# Altium PCB Q7 mini.PcbDoc
Units mm, origin at the board's own origin, x right, y up, seen from the top; angles counter-clockwise.
Board outline 24 x 40 mm, 2 copper layers (Top Layer, Bottom Layer); 30 components, 21 nets, 144 pads, 137 vias.
Unrouted connection lines stored in the file: 1.
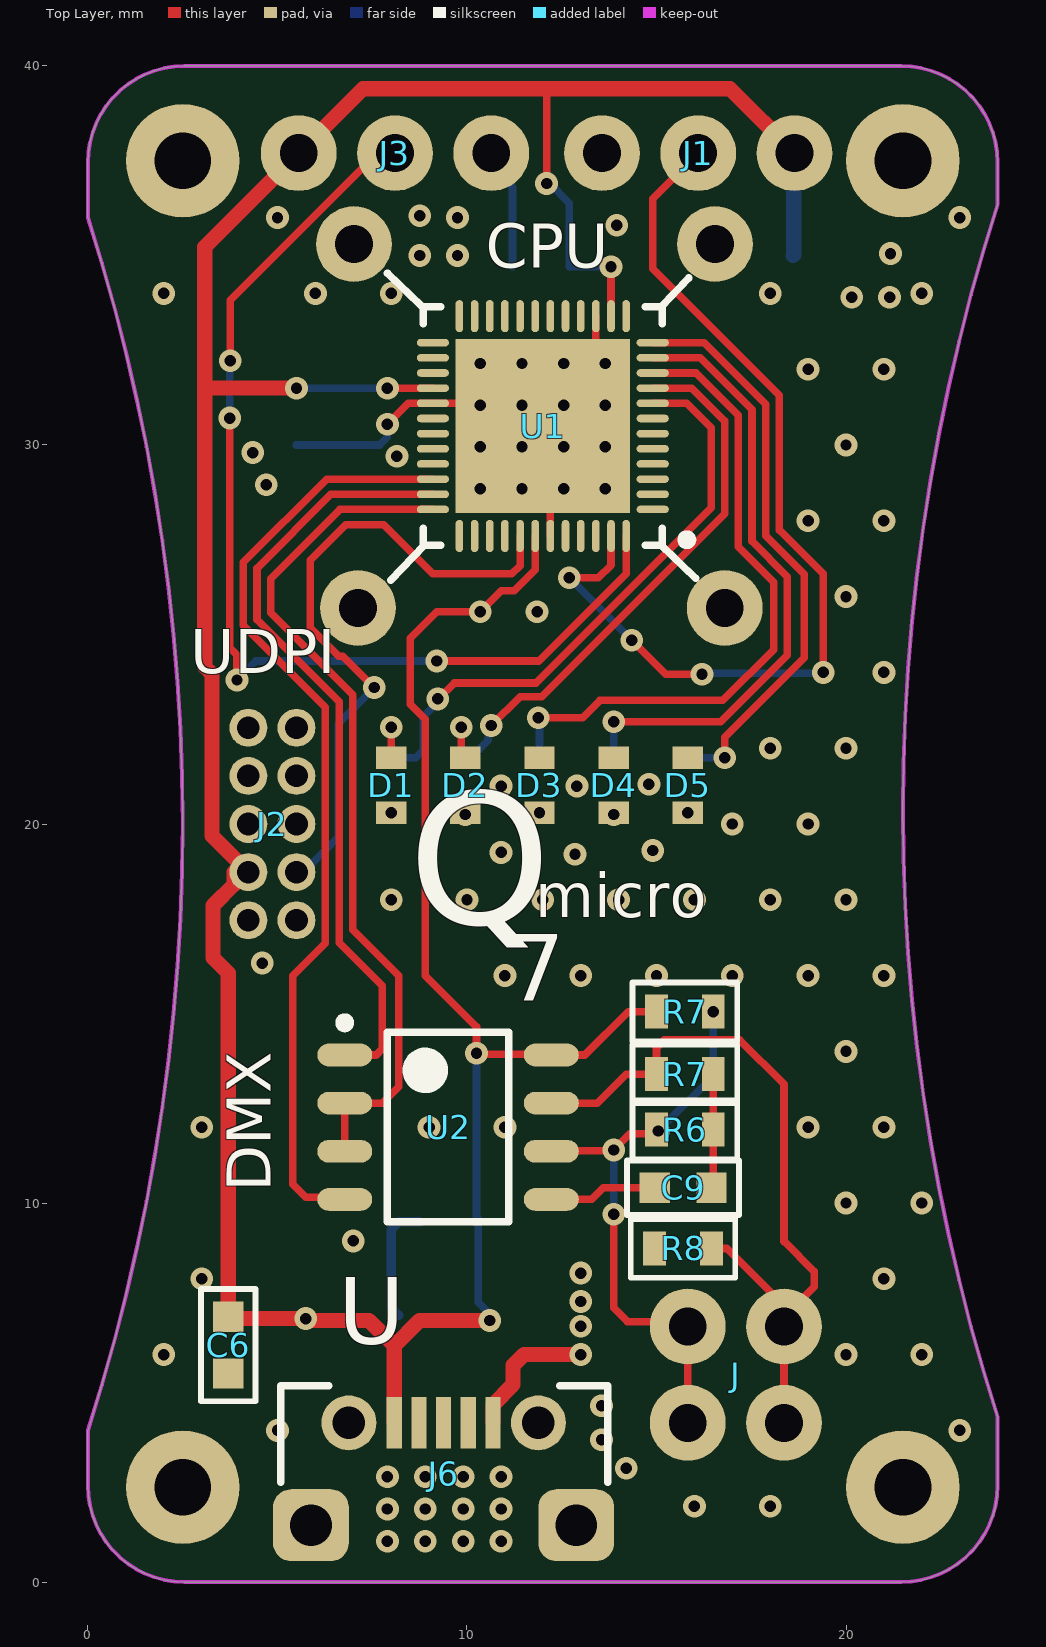
[diagram p0: Top Layer view]
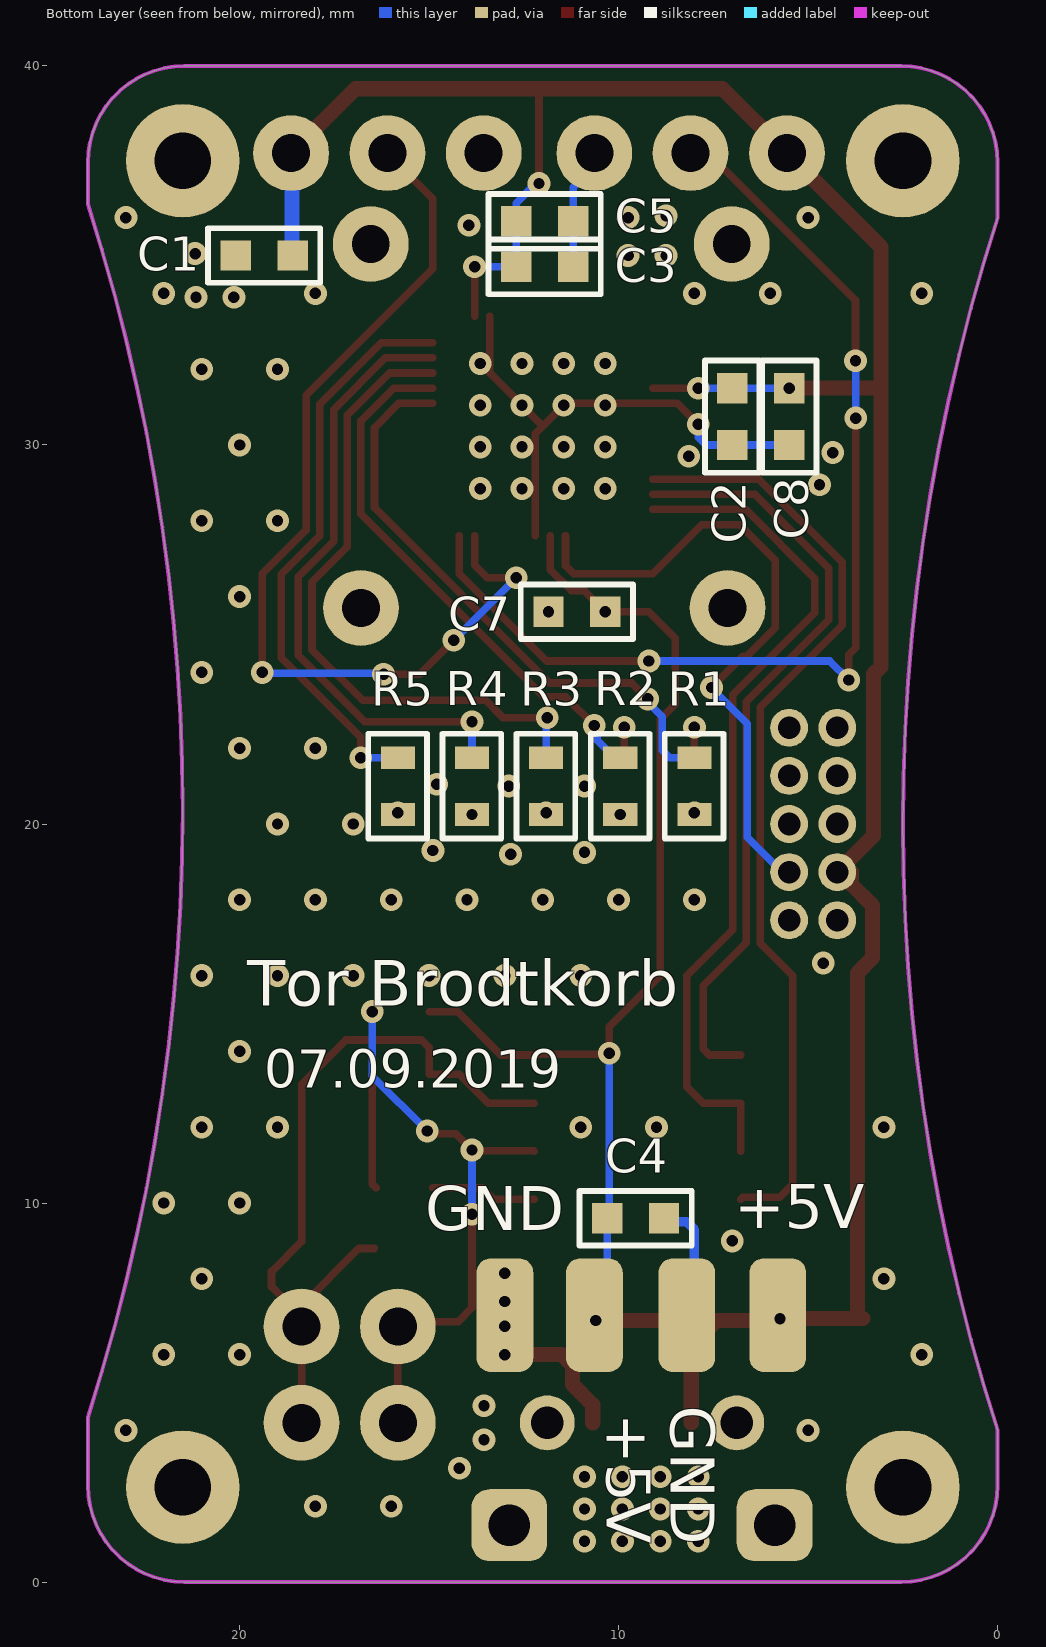
[diagram p1: Bottom Layer view, seen from below]
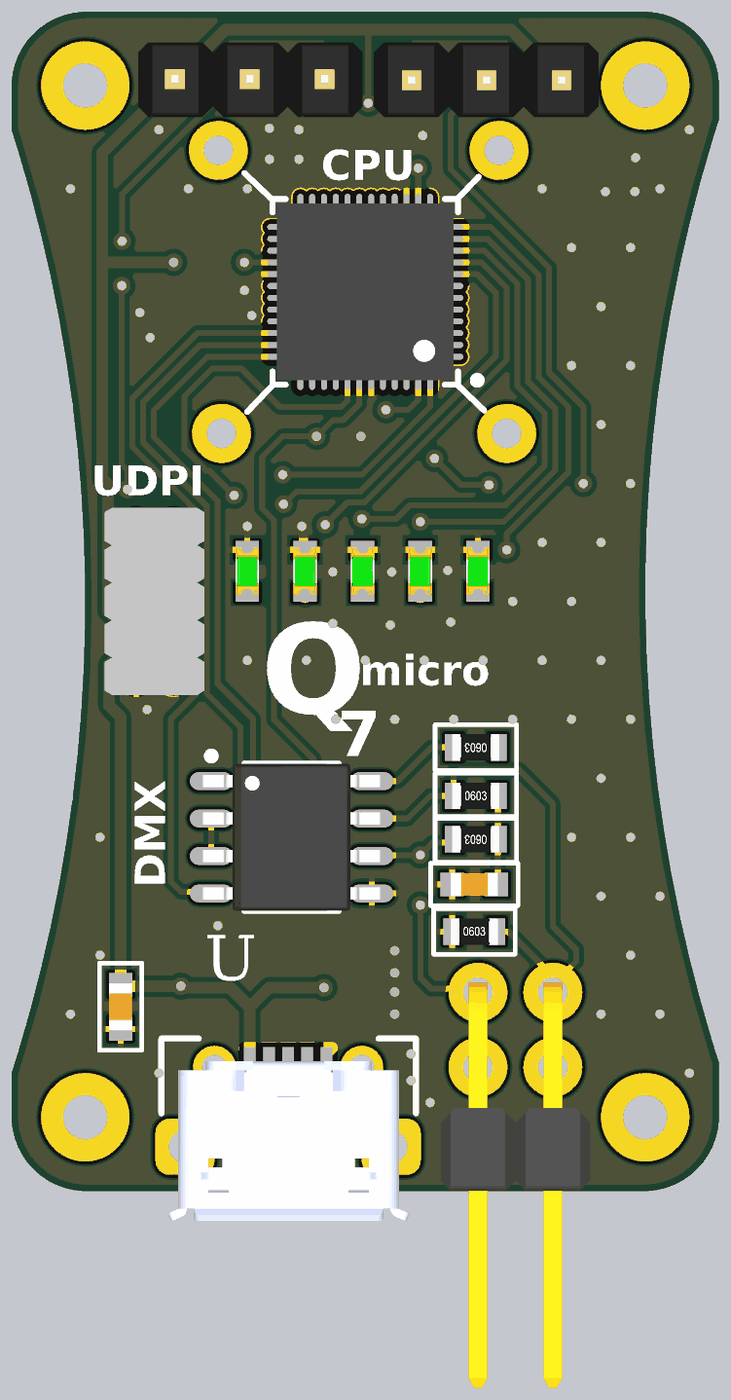
[diagram p2: 3D render of the assembled board from above, using the file's embedded part models]
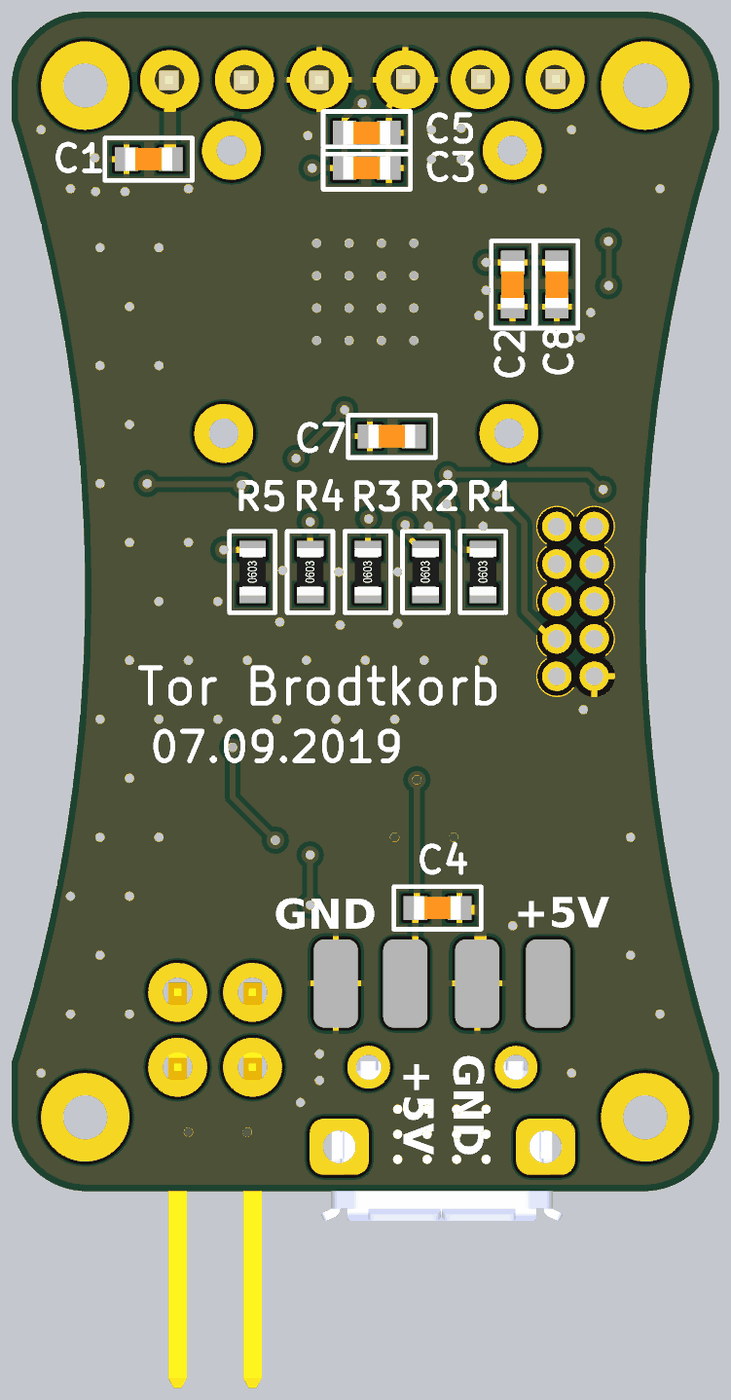
[diagram p3: 3D render of the assembled board from below, using the file's embedded part models]

## Layer stack, top to bottom
Top Solder: solder mask 0.0102, Solder Resist, Dk 3.5
Top Layer: signal copper 0.0356
Dielectric 1: dielectric 0.32, FR-4, Dk 4.8
Bottom Layer: signal copper 0.0356
Bottom Solder: solder mask 0.0102, Solder Resist, Dk 3.5

## Board outline
0,37.46 cw(c2.54,37.46) 2.54,40 21.46,40 cw(c21.46,37.46) 24,37.46 24,36.35 ccw(c74,20.35) 24,4.35 24,2.54 cw(c21.46,2.54) 21.46,0 2.54,0 cw(c2.54,2.54) 0,2.54 0,4 ccw(c-50,20) 0,36

## Design rules (kind name [scope] priority, off if disabled: settings)
Clearance [All] p1: gap=0.16 ignorepadtopadclearanceinfootprint=FALSE except(0: Arc-Text Arc-Hole Track-Text Track-Hole SMDPad-Text SMDPad-Hole THPad-Text THPad-Hole Via-Text Via-Hole Fill-Text Fill-Hole Poly-Text Poly-Hole Region-Text Region-Hole Text-Text Text-Hole)
DiffPairsRouting [All] p1: maxlimit=0.254 minlimit=0.254 mostfreqgap=0.254 toplayer_minwidth=0.16 toplayer_maxwidth=0.381 toplayer_prefwidth=0.2 bottomlayer_minwidth=0.16 bottomlayer_maxwidth=0.381 bottomlayer_prefwidth=0.2 maxuncoupledlength=12.7
Height [All] p1: minheight=0 maxheight=200 prefheight=12.7
HoleSize [All] p1: absolutevalues=TRUE maxlimit=6.35 minlimit=0.3 maxpercent=80.000 minpercent=20.000
MinimumSolderMaskSliver [All] p1: minsoldermaskwidth=0.1
PlaneClearance [All] p1: clearance=1
PlaneConnect [All] p1: planeconnectstyle=Relief reliefexpansion=0.508 reliefentries=4 reliefconductorwidth=1 reliefairgap=0.254
PolygonConnect PolygonConnect_1 [IsVia] p1: connectstyle=Direct reliefconductorwidth=0.254 reliefentries=4 polygonreliefangle="90 Angle" airgapwidth=0.254
PolygonConnect [All] p2: connectstyle=Relief reliefconductorwidth=0.2 reliefentries=4 polygonreliefangle="90 Angle" airgapwidth=0.2
RoutingVias [All] p1: holewidth=0.3 width=0.6 viastyle="Through Hole" minholewidth=0.3 minwidth=0.6 maxholewidth=6.35 maxwidth=10
SilkToSolderMaskClearance [IsPad] p1: minsilkscreentomaskgap=0.178 clearancetoexposedcopper=TRUE
SolderMaskExpansion [All] p1: expansion=0.102
Width [All] p1: maxlimit=5 minlimit=0.16 preferedwidth=0.2 minimp=50.000000 maximp=50.000000 favimp=50.000000
23 further rules are at their usual default settings.

## Classes and differential pairs
component class "[02] - MAIN": C1 C2 C3 C4 C5 C6 C7 C8 D1 D2 D3 D4 D5 J J1 J2 J3 J6 R1 R2 R3 R4 R5 R6 R7 R8 U1 U2

## Components (designator, comment, footprint, x,y, rotation, side; value= is the part's Value field where it differs from the comment)
C1 "02016D104KAT2A" C0603 19.35,35 r180 bottom value=100nF
C2 "02016D104KAT2A" C0603 7,30.75 r90 bottom value=100nF
C3 "02016D104KAT2A" C0603 11.95,34.7 r0 bottom value=100nF
C4 "02016D104KAT2A" C0603 9.55,9.6 r0 bottom value=100nF
C5 "02016D104KAT2A" C0603 11.95,35.9 r0 bottom value=100nF
C6 "02016D104KAT2A" C0603 3.7,6.25 r90 top value=100nF
C7 "02016D104KAT2A" C0603 11.1,25.6 r180 bottom value=100nF
C8 "02016D104KAT2A" C0603 5.5,30.75 r90 bottom value=100nF
C9 "02016D104KAT2A" C0603 15.7,10.4 r0 top value=100nF
D1 "LED Green" "L0603 GREEN" 8,21.025 r90 top
D2 "LED Green" "L0603 GREEN" 9.956,21.025 r90 top
D3 "LED Green" "L0603 GREEN" 11.912,21.025 r90 top
D4 "LED Green" "L0603 GREEN" 13.869,21.025 r90 top
D5 "LED Green" "L0603 GREEN" 15.825,21.025 r90 top
J "Header 2x2" "Header 2x2 2.54mm right angle male" 15.825,4.2 r0 top
J1 "Header" "Header 1x3 2.54mm" 18.64,37.7 r90 top
J2 "Header 2x3" "Header 2x5 1.27mm" 5.5,22.54 r180 top
J3 "Header" "Header 1x3 2.54mm" 5.56,37.7 r270 top
J6 "USB micro" "USB micro" 9.4,2 r0 top
R1 "CPF-A-0603B100KE1" R0603 8,21 r90 bottom value=1k
R2 "CPF-A-0603B100KE1" R0603 9.956,21 r90 bottom value=1k
R3 "CPF-A-0603B100KE1" R0603 11.912,21 r90 bottom value=1k
R4 "CPF-A-0603B100KE1" R0603 13.869,21 r90 bottom value=1k
R5 "CPF-A-0603B100KE1" R0603 15.825,21 r90 bottom value=1k
R6 "CPF-A-0603B100KE1" R0603 15.75,11.935 r180 top value=1k
R7 "CPF-A-0603B100KE1" R0603 15.75,15.05 r180 top value=1k
R7 "CPF-A-0603B100KE1" R0603 15.75,13.4 r0 top value=1k
R8 "CPF-A-0603B100KE1" R0603 15.7,8.8 r0 top value=1k
U1 "ATmega4809" ATMEGA4809-MFR 12,30.5 r180 top
U2 "RS485 tranciever" ST485CDR 9.5,12 r0 top

## Footprints (in the part's own frame and the unit in brackets; to place one, negate y for a bottom-side part, rotate by r counter-clockwise, add the part's x,y. Pads: shape width x height; smd on the part's side, far side on the other; paste and mask are expansions set on the pad)
ATMEGA4809-MFR [mm] "QFN, 48-Leads, Body 6.00x6.00mm, Pitch 0.40mm, Thermal Pad 4.60x4.60mm, IPC Medium Density"
  oval 0.85x0.2 smd mask+0.212: 1(-2.9,2.2) 2(-2.9,1.8) 3(-2.9,1.4) 4(-2.9,1) 5(-2.9,0.6) 6(-2.9,0.2) 7(-2.9,-0.2) 8(-2.9,-0.6) 9(-2.9,-1) 10(-2.9,-1.4) 11(-2.9,-1.8) 12(-2.9,-2.2) 25(2.9,-2.2) 26(2.9,-1.8) 27(2.9,-1.4) 28(2.9,-1) 29(2.9,-0.6) 30(2.9,-0.2) 31(2.9,0.2) 32(2.9,0.6) 33(2.9,1) 34(2.9,1.4) 35(2.9,1.8) 36(2.9,2.2)
  oval 0.2x0.85 smd mask+0.212: 13(-2.2,-2.9) 14(-1.8,-2.9) 15(-1.4,-2.9) 16(-1,-2.9) 17(-0.6,-2.9) 18(-0.2,-2.9) 19(0.2,-2.9) 20(0.6,-2.9) 21(1,-2.9) 22(1.4,-2.9) 23(1.8,-2.9) 24(2.2,-2.9) 37(2.2,2.9) 38(1.8,2.9) 39(1.4,2.9) 40(1,2.9) 41(0.6,2.9) 42(0.2,2.9) 43(-0.2,2.9) 44(-0.6,2.9) 45(-1,2.9) 46(-1.4,2.9) 47(-1.8,2.9) 48(-2.2,2.9)
  rect 4.6x4.6 smd: 49(0,0)
  silkscreen extent -3.93,-3.15 3.15,3.15, body extent -3,-3 3,3, height 0.55
C0603 [mm]
  rect 0.8x0.8 smd: 1(-0.75,0) 2(0.75,0)
  silkscreen extent -1.48,-0.72 1.48,0.72, body extent -0.8,-0.4 0.8,0.4, height 0.8
"Header 1x3 2.54mm" [mm]
  round 2 hole 1: 1(0,0) 2(0,2.54) 3(0,5.08)
  body extent -1.27,-1.27 1.27,6.35, height 9.2
"Header 2x2 2.54mm right angle male" [mm]
  round 2 hole 1: 1(0,0) 2(2.54,0) 3(0,2.54) 4(2.54,2.54)
  body extent -1.27,-10.88 3.81,2.86, height 5.63
"Header 2x5 1.27mm" [mm]
  round 1 hole 0.6 mask+0.202: 1(0,0) 2(1.27,0) 3(0,1.27) 4(1.27,1.27) 5(0,2.54) 6(1.27,2.54) 7(0,3.81) 8(1.27,3.81) 9(0,5.08) 10(1.27,5.08)
  body extent -1.05,-0.64 2.35,5.72, height 5.5
"L0603 GREEN" [mm]
  rect 0.6x0.8 smd: 1(-0.725,0) 2(0.725,0)
  body extent -0.8,-0.4 0.8,0.4, height 0.6
R0603 [mm]
  rect 0.6x0.9 smd: 1(-0.75,0) 2(0.75,0)
  silkscreen extent -1.38,-0.77 1.38,0.78, body extent -0.8,-0.45 0.8,0.45, height 0.5
ST485CDR [mm] "SOIC, 8-Leads, Body 4.90x3.90mm, Pitch 1.27mm, IPC Medium Density"
  oval 1.45x0.6 smd: 1(-2.725,1.905) 2(-2.725,0.635) 3(-2.725,-0.635) 4(-2.725,-1.905) 5(2.725,-1.905) 6(2.725,-0.635) 7(2.725,0.635) 8(2.725,1.905)
  silkscreen extent -2.85,-2.5 1.6,2.88, body extent -3,-2.5 3,2.5, height 1.75
"USB micro" [mm]
  rrect50% 2x1.9 hole 1.1 unplated: 0(-3.517,-0.5) 0(3.483,-0.5)
  round 1.45 hole 0.85 unplated: 0(-2.517,2.2) 0(2.483,2.2)
  rect 0.4x1.35 smd mask+0.18: 1(-1.317,2.2) 2(-0.667,2.2) 3(-0.017,2.2) 4(0.633,2.2) 5(1.283,2.2)
  silkscreen extent -4.32,0.64 4.32,3.17, body extent -4.1,-3.03 4.1,2.4, height 0.23

## Part data
C1 C2 C3 C4 C5 C6 C7 C8 C9: "C0603"
D1 D2 D3 D4 D5: library part HSMG-C196, "LED 0603 Green", Color=Green
J: library part 609-3342-ND, "Header 2x2 2.54mm, male, right angle"
J1 J3: library part 2212S-05SG-83, "Header 1x3 2.54mm female"
J2: library part 20021111-00010T4LF, "Header  2x5 1.27mm male"
J6: library part 47590-0001
R1 R2 R3 R4 R5 R6 R7 R7 R8: "R0603"
U1: library part ATMEGA4809-MFR, "ATmega4809 48-pin UQFN"
U2: library part ST485CDR

## Free pads (board coordinates)
  rrect50% 1.5x3 smd far side: 9(5.8,7.04) 10(8.2,7.04) 11(10.64,7.04) 12(13,7.04)
  round 3 hole 1.5: ""(2.5,2.5) ""(2.5,37.5) ""(21.5,2.5) ""(21.5,37.5)
  round 2 hole 1: ""(7.015,35.3) ""(7.123,25.7) ""(16.54,35.3) ""(16.8,25.7)

## Via types
v1: diameter 0.6, hole 0.3, Top Layer to Bottom Layer, tented both sides, 137 vias

## Nets (pads, with @x,y where several pads share a name; then routed paths per layer and width w, separated by ;. In a path a pad name is that pad's centre, name@x,y a point inside that pad or via, vN(x,y) a via of type N, cw(c..) or ccw(c..) an arc to the next point about the centre after c; other vN are vias at no path point)
5V+: C1.2 C2.2 C3.2 C4.2 C5.2 C6.2 C7.2 C8.2 J1.1 J2.8 J3.1 J6.1 pad.9 pad.11 R7.2@15,15.05 U1.14 U1.28 U1.42 U2.8 | length 101.8
  Top Layer w0.2: v1(7.9,31.5) U1.28 ; U1.42 11.8,26.708 11.242,26.15 10.9,26.15 v1(10.35,25.6) 9.2,25.6 8.5,24.9 8.5,23.158 8.9,22.758 8.9,16 10.25,14.65 v1(10.25,13.95) 10.273,13.927 12.202,13.927 U2.8 13.105,13.905 14.25,15.05 R7.2@15,15.05 ; v1(12.1,36.9) 12.1,39.4 ; U1.14 v1(13.8,34.7)
  Top Layer w0.4: 3.2,31.5 v1(5.5,31.5) ; C6.2@3.55,6.95 v1(5.742,6.95) ; C6.2 3.7,16.07 3.3,16.47 3.3,17.85 3.86,18.41 J2.8@3.86,18.73 ; J2.8 3.27,19.69 3.27,23.96 3.08,24.15 3.08,35.22 J3.1 7.26,39.4 12.1,39.4 16.94,39.4 J1.1 ; v1@5.742,6.9 7.415,6.9 8.083,6.233 ; J6.1 8.083,6.233 ; v1(10.6,6.9) 8.75,6.9 8.083,6.233
  Bottom Layer w0.2: v1(5.5,31.5) C2.2 v1(7.9,31.5) ; C4.2@10.25,9.5 v1(10.25,13.95) ; C4.2 10.3,9.5 10.3,7.38 pad.11 ; v1(12.1,36.9) 12.183,36.9 12.7,36.383 C5.2 C3.2 v1(13.8,34.7)
  Bottom Layer w0.25: C4.2@10.25,9.5 C4.2@10.3,9.5
  Bottom Layer w0.4: C1.2 18.62,35.02 18.62,37.68 J1.1
DMX+: J.1 J.3 R6.2 R7.1@16.5,15.05 U2.6 | length 15.5
  Top Layer w0.2: U2.6 12.242,11.383 13.851,11.383 v1(13.869,11.4) 14.293,11.824 R6.2@14.889,11.824 ; v1(13.869,9.7) 13.869,7.231 14.235,6.865 15.7,6.865 J.3 J.1
  Bottom Layer w0.2: v1(13.869,9.7) v1(13.869,11.4) ; v1(15.05,11.9) 16.5,13.35 v1(16.5,15.05)
DMX-: J.2 J.4 R7.1@15,13.4 R8.2 U2.7 | length 20.1
  Top Layer w0.2: U2.7 13.435,12.635 14.2,13.4 15,13.4 15,14.1 15.2,14.3 17.2,14.3 18.365,13.135 18.365,8.985 19.158,8.192 19.158,7.786 J.4@18.365,6.993 ; R8.2 16.85,8.8 18.365,7.285 J.4@18.365,6.993 ; J.2 J.4 J.4@18.365,6.993
GND: C1.1 C2.1 C3.1 C4.1 C5.1 C6.1 C7.1 C8.1 C9.1 D1.2 D2.2 D3.2 D4.2 D5.2 J1.3 J2.10 J3.3 J6.5 pad.10 pad.12 R8.1 U1.15 U1.29 U1.43 U1.49 U2.5 | length 28.4
  Top Layer w0.2: v1(7.9,30.55) 8.45,31.1 U1.29 11.4,31.1 v1(11.45,31.05) U1.49 ; D1.2 v1(8,22.55) ; v1(9.85,22.55) 9.85,21.856 D2.2 ; U1.43 12.2,30.3 U1.49 ; U2.5 13.295,10.095 13.6,10.4 C9.1@14.9,10.4 ; U1.15 13.4,31.9 U1.49
  Top Layer w0.4: J6.5 10.683,4.675 11.217,5.21 11.217,5.717 11.5,6 v1(13,6)
  Bottom Layer w0.2: C8.1 C2.1 7.7,30 7.9,30.2 v1(7.9,30.55) ; v1@7.95,22.6 v1(8,22.55) ; J3.3 10.64,37.36 11.2,36.8 C5.1 C3.1
  Bottom Layer w0.25: pad.10 8,7.24 8,9.3 8.2,9.5 C4.1@8.75,9.5
  other v1: 7.9,1.075 8.9,1.075 9.9,1.075 10.9,1.075 7.9,1.925 8.9,1.925 9.9,1.925 10.9,1.925 16,2 18,2 7.9,2.775 8.9,2.775 9.9,2.775 10.9,2.775 14.2,3 13.55,3.754 5,4 23,4 13.55,4.65 2,6 20,6 22,6 13,6.75 13,7.4 3,8 21,8 13,8.15 7,9 20,10 22,10 3,12 9,12 11,12 19,12 21,12 20,14 11,16 13,16 15,16 17,16 19,16 21,16 4.6,16.33 8,18 10,18 12,18 14,18 16,18 18,18 20,18 12.85,19.2 10.9,19.25 14.9,19.3 17,20 19,20 10.9,21 12.9,21 14.8,21.05 18,22 20,22 21,24 11.85,25.6 20,26 19,28 21,28 10.35,28.85 11.45,28.85 12.55,28.85 13.65,28.85 4.7,28.95 8.15,29.7 4.35,29.8 10.35,29.95 11.45,29.95 12.55,29.95 13.65,29.95 20,30 10.35,31.05 12.55,31.05 13.65,31.05 19,32 21,32 10.35,32.15 11.45,32.15 12.55,32.15 13.65,32.15 20.15,33.9 21.15,33.9 2,34 6,34 8,34 18,34 22,34 8.75,35 9.75,35 21.175,35.05 13.95,35.8 5,36 9.75,36 23,36 8.75,36.05
NetC9_2: C9.2 R6.1 R7.2@16.5,13.4 | length 3
  Top Layer w0.2: C9.2@16.4,10.4 16.5,10.5 R6.1 R7.2@16.5,13.4
NetD1_1: D1.1 R1.1 | length 0
  other v1: 8,20.3
NetD2_1: D2.1 R2.1
  other v1: 9.956,20.25
NetD3_1: D3.1 R3.1 | length 0
  other v1: 11.912,20.3
NetD4_1: D4.1 R4.1
  other v1: 13.869,20.25
NetD5_1: D5.1 R5.1 | length 0
  other v1: 15.825,20.3
NetJ1_2: J1.2 U1.47 | length 25.8
  Top Layer w0.2: v1(12.7,26.5) 13.467,26.5 13.8,26.833 U1.47 ; v1(14.35,24.85) 15.25,23.95 v1(16.2,23.95) ; J1.2 14.9,36.5 14.9,34.65 18.24,31.31 18.24,27.757 19.4,26.597 v1(19.4,24)
  Bottom Layer w0.2: v1(12.7,26.5) v1(14.35,24.85) ; v1(16.2,23.95) 16.225,23.975 19.375,23.975 v1(19.4,24)
NetJ3_2: J3.2 U1.48 | length 28.9
  Top Layer w0.2: v1(3.74,30.71) 3.74,24.651 3.93,24.461 v1(3.93,23.8) ; v1(3.75,32.22) 3.75,33.817 7.633,37.7 J3.2 J3.2@8.1,37.262 ; v1(9.2,24.3) 11.891,24.3 14.2,26.609 U1.48
  Bottom Layer w0.2: v1(3.74,30.71) 3.74,32.21 v1(3.75,32.22) ; v1(3.93,23.8) 4.43,24.3 v1(9.2,24.3)
NetR1_2: R1.2 U1.8 | length 15.7
  Top Layer w0.2: v1(9.23,23.3) 9.239,23.3 9.659,23.72 11.82,23.72 16.44,28.34 16.44,30.46 15.8,31.1 U1.8
  Bottom Layer w0.2: R1.2 8.65,21.75 8.85,21.95 8.85,22.831 9.23,23.211 v1(9.23,23.3)
NetR2_2: R2.2 U1.9 | length 14.4
  Top Layer w0.2: v1(10.642,22.6) 11.402,23.36 11.969,23.36 16.8,28.191 16.8,30.633 15.933,31.5 U1.9
  Bottom Layer w0.2: R2.2 10.106,21.75 10.565,22.209 10.565,22.523 v1(10.642,22.6)
NetR3_2: R3.2 U1.10 | length 17.3
  Top Layer w0.2: v1(11.883,22.8) 13.05,22.8 13.51,23.26 16.75,23.26 18.09,24.6 18.09,26.38 17.16,27.31 17.16,30.782 16.042,31.9 U1.10
  Bottom Layer w0.2: v1(11.883,22.8) 11.912,22.77 R3.2
NetR4_2: R4.2 U1.11 | length 16.3
  Top Layer w0.2: v1(13.869,22.7) 16.699,22.7 18.45,24.451 18.45,26.529 17.52,27.459 17.52,30.931 16.151,32.3 U1.11
  Bottom Layer w0.2: R4.2 v1(13.869,22.7)
NetR5_2: R5.2 U1.12 | length 15.2
  Top Layer w0.2: U1.12 16.26,32.7 17.88,31.08 17.88,27.608 18.9,26.588 18.9,24.392 16.8,22.292 v1(16.8,21.75)
  Bottom Layer w0.2: R5.2 v1(16.8,21.75)
NetU1_34: U1.34 U2.4 | length 25.1
  Top Layer w0.2: U2.4 6.72,10.15 5.75,10.15 5.4,10.5 5.4,16 6.26,16.86 6.26,23.081 4.1,25.241 4.1,26.9 6.3,29.1 U1.34
NetU1_35: U1.35 U2.1 | length 20.6
  Top Layer w0.2: U2.1 7.605,13.905 7.766,14.066 7.766,15.734 6.63,16.87 6.63,23.22 4.46,25.39 4.46,26.751 6.409,28.7 U1.35
NetU1_36: U1.36 U2.2 U2.3 | length 22.7
  Top Layer w0.2: U2.3 U2.2 7.766,12.635 8.2,13.069 8.2,16 6.99,17.21 6.99,23.41 4.82,25.58 4.82,26.47 6.65,28.3 U1.36
UPDI: J2.7 U1.41 | length 17.3
  Top Layer w0.2: v1(7.55,23.6) 6.723,24.427 6.614,24.427 5.863,25.178 5.863,26.963 6.8,27.9 7.8,27.9 9.1,26.6 11.183,26.6 11.4,26.817 U1.41
  Bottom Layer w0.2: J2.7 5.68,18.73 6.6,19.65 6.6,22.65 v1(7.55,23.6)
pads on no net: J2.1 J2.2 J2.3 J2.4 J2.5 J2.6 J2.9 J6.0 J6.2 J6.3 J6.4 U1.1 U1.2 U1.3 U1.4 U1.5 U1.6 U1.7 U1.13 U1.16 U1.17 U1.18 U1.19 U1.20 U1.21 U1.22 U1.23 U1.24 U1.25 U1.26 U1.27 U1.30 U1.31 U1.32 U1.33 U1.37 U1.38 U1.39 U1.40 U1.44 U1.45 U1.46

## Polygon pours and split planes (outlines as drawn)
GND on Bottom Layer "Top Layer-No Net1" (solid, shelved, pour order 1): 0,37.46 cw(c2.54,37.46) 2.54,40 21.46,40 cw(c21.46,37.46) 24,37.46 24,36.35 ccw(c74,20.35) 24,4.35 24,2.54 cw(c21.46,2.54) 21.46,0 2.54,0 cw(c2.54,2.54) 0,2.54 0,4 ccw(c-50,20) 0,36
GND on Top Layer "Top Layer-No Net" (solid, shelved, pour order 0): 0,37.46 cw(c2.54,37.46) 2.54,40 21.46,40 cw(c21.46,37.46) 24,37.46 24,36.35 ccw(c74,20.35) 24,4.35 24,2.54 cw(c21.46,2.54) 21.46,0 2.54,0 cw(c2.54,2.54) 0,2.54 0,4 ccw(c-50,20) 0,36

## Keep-outs
Keep-Out Layer:
  the board outline again, w0.1

## Other copper
Top Layer:
  region net 5V+: 5.9,3

## Silkscreen, mask and mechanical layers (free items; w line width, h text height)
Top Overlay:
  lines w0.2: 7.903,34.53 8.823,33.65 ; 7.993,26.43 8.873,27.35 ; 15.123,27.35 16.03,26.482 ; 15.123,33.65 15.846,34.406
  text "CPU" at 10.5,34.3 h2
  text "UDPI" at 2.7,23.6 h2
  text "micro" at 11.806,17.16 h2
  text "Q" at 8.456,16.21 h6
  text "7" at 11.056,14.76 h3
  text "DMX" at 5.2,10.3 h2 r90
  text "U" at 6.6,5.7 h3
Bottom Overlay:
  text "Tor Brodtkorb" at 19.8,15.2 h1.2
  text "07.09.2019" at 19.349,13.035 h1
  text "+5V" at 6.95,8.95 h2
  text "GND" at 15.1,8.9 h2
  text "GND" at 9,4.65 h2 r90
  text "+5V" at 10.7,4.45 h2 r90
Mechanical 1:
  lines w0.254: 13.223,33.1 13.223,33.1